# EAGLE board Ekspander (EAGLE 8.6.3)
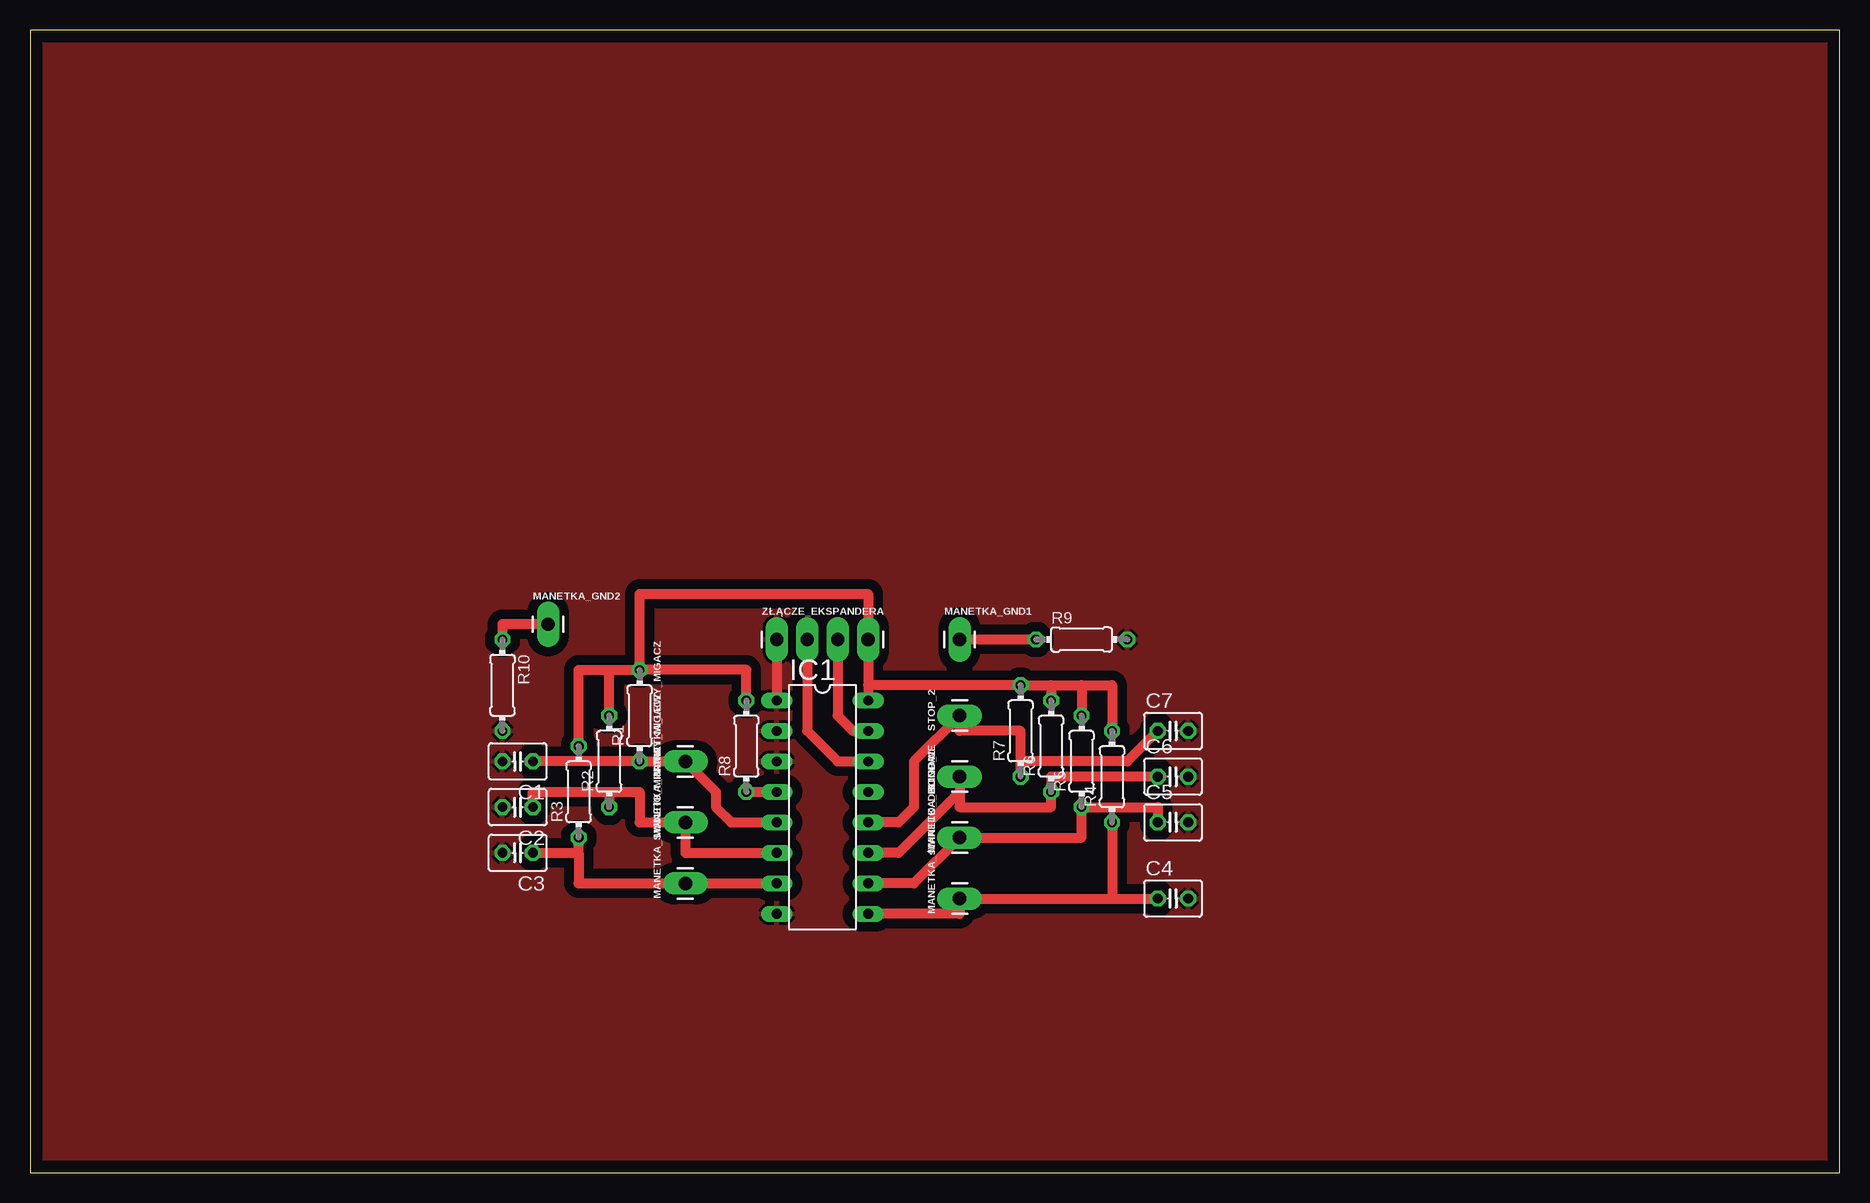
[diagram p0: board, top side]

Size 150.8 x 95.24 mm. Coordinates in mm from the lower left corner, seen from the top.
Outline: 0,0 150.8,0 150.8,95.24 0,95.24 0,0
Copper layers (1*16): Top 0.035mm / dielectric 1.5mm / Bottom 0.035mm
Design rules "default": minimum track width 6mil, minimum drill 0.35mm, track to track 6mil, track to pad 6mil, pad to pad 6mil, via to via 6mil, smd to smd 6mil, copper to edge 40mil, drill to drill 6mil, minimum pad ring 10mil, minimum via ring 8mil, stop-mask expansion 4mil, vias tented up to drill 0mil, thermal gap 10mil

## Footprints (pad centres in the part's own frame; a part is rotated, then mirrored left to right if it is on the bottom)
C025-030X050 = drill 0.813 octagon: 1 -1.27,0; 2 1.27,0
DIL16 = drill 0.813 long: 1 -8.89,-3.81; 2 -6.35,-3.81; 3 -3.81,-3.81; 4 -1.27,-3.81; 5 1.27,-3.81; 6 3.81,-3.81; 7 6.35,-3.81; 8 8.89,-3.81; 9 8.89,3.81; 10 6.35,3.81; 11 3.81,3.81; 12 1.27,3.81; 13 -1.27,3.81; 14 -3.81,3.81; 15 -6.35,3.81; 16 -8.89,3.81
1X01_LONGPAD = drill 1.118 pad 1.88 long: 1 0,0
0204/7 = drill 0.813 octagon: 1 -3.81,0; 2 3.81,0
1X04_LONGPADS = drill 1.118 pad 1.88 long: 1 0,0; 2 2.54,0; 3 5.08,0; 4 7.62,0

## Placement (x,y rotation side)
C1  [C025-030X050]  40.64,34.29 180 top
C2  [C025-030X050]  40.64,30.48 180 top
C3  [C025-030X050]  40.64,26.67 180 top
C4  [C025-030X050]  95.25,22.86 0 top
C5  [C025-030X050]  95.25,29.21 0 top
C6  [C025-030X050]  95.25,33.02 0 top
C7  [C025-030X050]  95.25,36.83 0 top
IC1  PCF8574P  [DIL16]  66.04,30.48 270 top
MANETKA_BLINDA  [1X01_LONGPAD]  77.47,27.94 90 top
MANETKA_GND1  [1X01_LONGPAD]  77.47,44.45 0 top
MANETKA_GND2  [1X01_LONGPAD]  43.18,45.72 0 top
MANETKA_LEWY_MIGACZ  [1X01_LONGPAD]  54.61,34.29 90 top
MANETKA_PRAWY_MIGACZ  [1X01_LONGPAD]  54.61,29.21 90 top
MANETKA_SWIATłO_MIJANIA  [1X01_LONGPAD]  54.61,24.13 90 top
MANETKA_śWIATLO_DROGOWE  [1X01_LONGPAD]  77.47,22.86 90 top
R1  [0204/7]  50.8,38.1 90 top
R2  [0204/7]  48.26,34.29 90 top
R3  [0204/7]  45.72,31.75 90 top
R4  [0204/7]  90.17,33.02 90 top
R5  [0204/7]  87.63,34.29 90 top
R6  [0204/7]  85.09,35.56 90 top
R7  [0204/7]  82.55,36.83 90 top
R8  [0204/7]  59.69,35.56 90 top
R9  330 ohm  [0204/7]  87.63,44.45 0 top
R10  330 ohm  [0204/7]  39.37,40.64 270 top
STOP_1  [1X01_LONGPAD]  77.47,33.02 90 top
STOP_2  [1X01_LONGPAD]  77.47,38.1 90 top
ZŁĄCZE_EKSPANDERA  [1X04_LONGPADS]  62.23,44.45 0 top

## Library data of the parts
C1-C7 = rcl; SPICEPREFIX: C
IC1 = micro-philips; MPN: PCF8574PN; OC_FARNELL: 204020; OC_NEWARK: 11N8515
MANETKA_BLINDA MANETKA_GND1 MANETKA_GND2 MANETKA_LEWY_MIGACZ MANETKA_PRAWY_MIGACZ MANETKA_SWIATłO_MIJANIA MANETKA_śWIATLO_DROGOWE STOP_1 STOP_2 = SparkFun-Connectors
R1-R10 = rcl; SPICEPREFIX: R
ZŁĄCZE_EKSPANDERA = SparkFun-Connectors; PROD_ID: CONN-09696

## Nets
0: IC1.4 R8.1
1: C1.1 IC1.5 MANETKA_LEWY_MIGACZ.1 R1.1
2: C2.1 IC1.6 MANETKA_PRAWY_MIGACZ.1 R2.1
3: C3.1 IC1.7 MANETKA_SWIATłO_MIJANIA.1 R3.1
4: C4.1 IC1.9 MANETKA_śWIATLO_DROGOWE.1 R4.1
5: C5.1 IC1.10 MANETKA_BLINDA.1 R5.1
5V_I: IC1.16 R1.2 R2.2 R3.2 R4.2 R5.2 R6.2 R7.2 R8.2 ZŁĄCZE_EKSPANDERA.4
6: C6.1 IC1.11 R6.1 STOP_1.1
7: C7.1 IC1.12 R7.1 STOP_2.1
GND_I: C1.2 C2.2 C3.2 C4.2 C5.2 C6.2 C7.2 IC1.1 IC1.2 IC1.3 IC1.8 R9.2 R10.2 ZŁĄCZE_EKSPANDERA.1
N$1: MANETKA_GND1.1 R9.1
N$2: MANETKA_GND2.1 R10.1
SCL: IC1.14 ZŁĄCZE_EKSPANDERA.2
SDA: IC1.15 ZŁĄCZE_EKSPANDERA.3

## Tracks (layer width: path | path; a pad name or v marks a point on that pad's centre or on a via)
0
  Top 0.813: R8.1 IC1.4
1
  Top 0.813: C1.1 R1.1 MANETKA_LEWY_MIGACZ.1 57.15,31.75 57.15,30.48 58.42,29.21 IC1.5
2
  Top 0.813: IC1.6 54.61,26.67 MANETKA_PRAWY_MIGACZ.1 50.8,29.21 50.8,31.75 48.26,31.75 | C2.1 41.91,31.75 48.26,31.75 | 48.26,31.75 R2.1
3
  Top 0.813: IC1.7 MANETKA_SWIATłO_MIJANIA.1 45.72,24.13 45.72,26.67 | C3.1 45.72,26.67 | 45.72,26.67 R3.1
4
  Top 0.813: IC1.9 77.47,21.59 MANETKA_śWIATLO_DROGOWE.1 90.17,22.86 | 90.17,22.86 C4.1 | R4.1 90.17,22.86
5
  Top 0.813: IC1.10 73.66,24.13 MANETKA_BLINDA.1 87.63,27.94 R5.1 93.98,30.48 C5.1
5V_I
  Top 0.813: 69.85,40.64 ZŁĄCZE_EKSPANDERA.4 69.85,48.26 50.8,48.26 R1.2 | 69.85,40.64 IC1.16 | R3.2 45.72,41.91 48.26,41.91 | 48.26,41.91 R1.2 | R2.2 48.26,41.91 | R8.2 59.69,41.91 R1.2 | 85.09,40.64 R7.2 69.85,40.64 | 85.09,40.64 R6.2 | 85.09,40.64 87.63,40.64 | 87.63,40.64 R5.2 | 87.63,40.64 90.17,40.64 R4.2
6
  Top 0.813: IC1.11 72.39,26.67 77.47,31.75 STOP_1.1 77.47,30.48 85.09,30.48 R6.1 85.09,33.02 C6.1
7
  Top 0.813: IC1.12 72.39,29.21 73.66,30.48 73.66,34.29 STOP_2.1 77.47,36.83 82.55,36.83 82.55,34.29 | R7.1 82.55,34.29 | C7.1 91.44,34.29 82.55,34.29
GND_I
  Top 0.813: ZŁĄCZE_EKSPANDERA.1 IC1.1
  pour Top (isolate 0.813): -3.81,96.52 153.67,96.52 153.67,-2.54 -2.54,-2.54 -2.54,95.25
N$1
  Top 0.813: MANETKA_GND1.1 R9.1
N$2
  Top 0.813: MANETKA_GND2.1 39.37,45.72 R10.1
SCL
  Top 0.813: IC1.14 67.31,34.29 64.77,36.83 ZŁĄCZE_EKSPANDERA.2
SDA
  Top 0.813: IC1.15 68.58,36.83 67.31,38.1 ZŁĄCZE_EKSPANDERA.3